# Altium PCB NBIOT.PcbDoc (part 1 of 3)
Units mm, origin at the board's own origin, x right, y up, seen from the top; angles counter-clockwise.
Board outline 152.4 x 101.6 mm, 2 copper layers (Top Layer, Bottom Layer); 66 components, 55 nets, 202 pads, 65 vias.
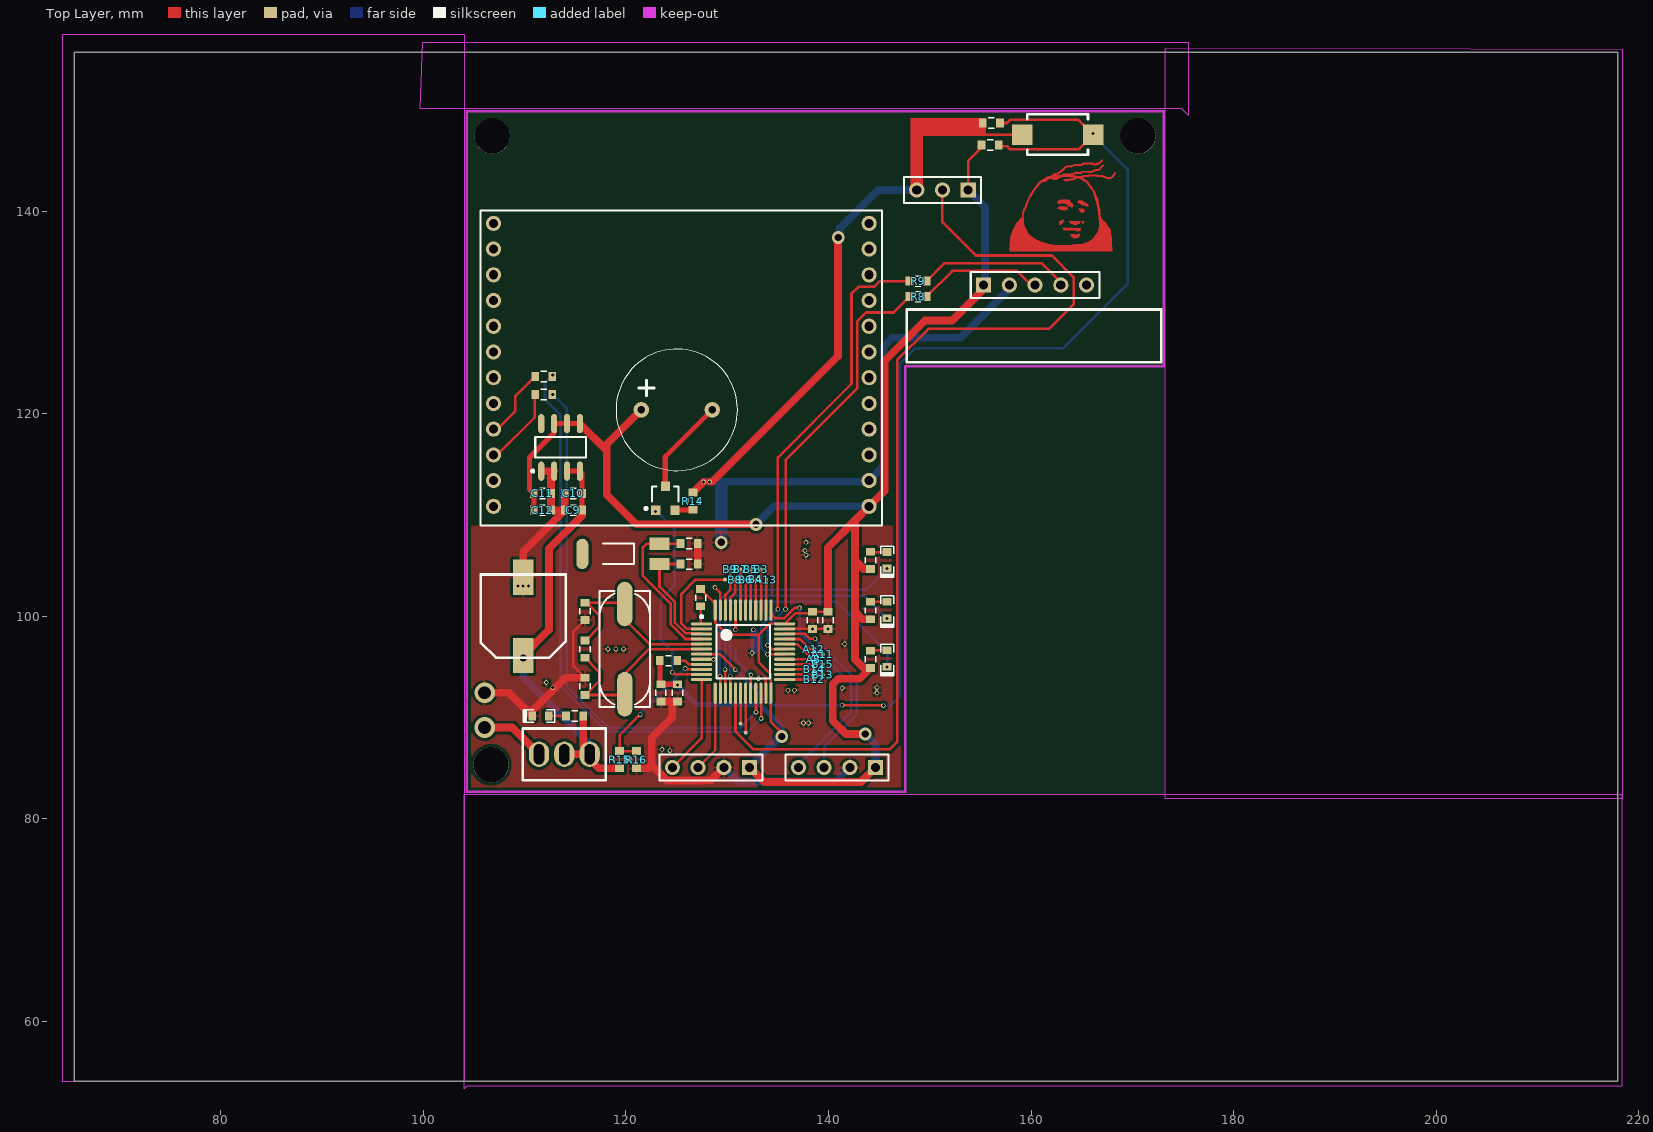
[diagram p0: Top Layer view]
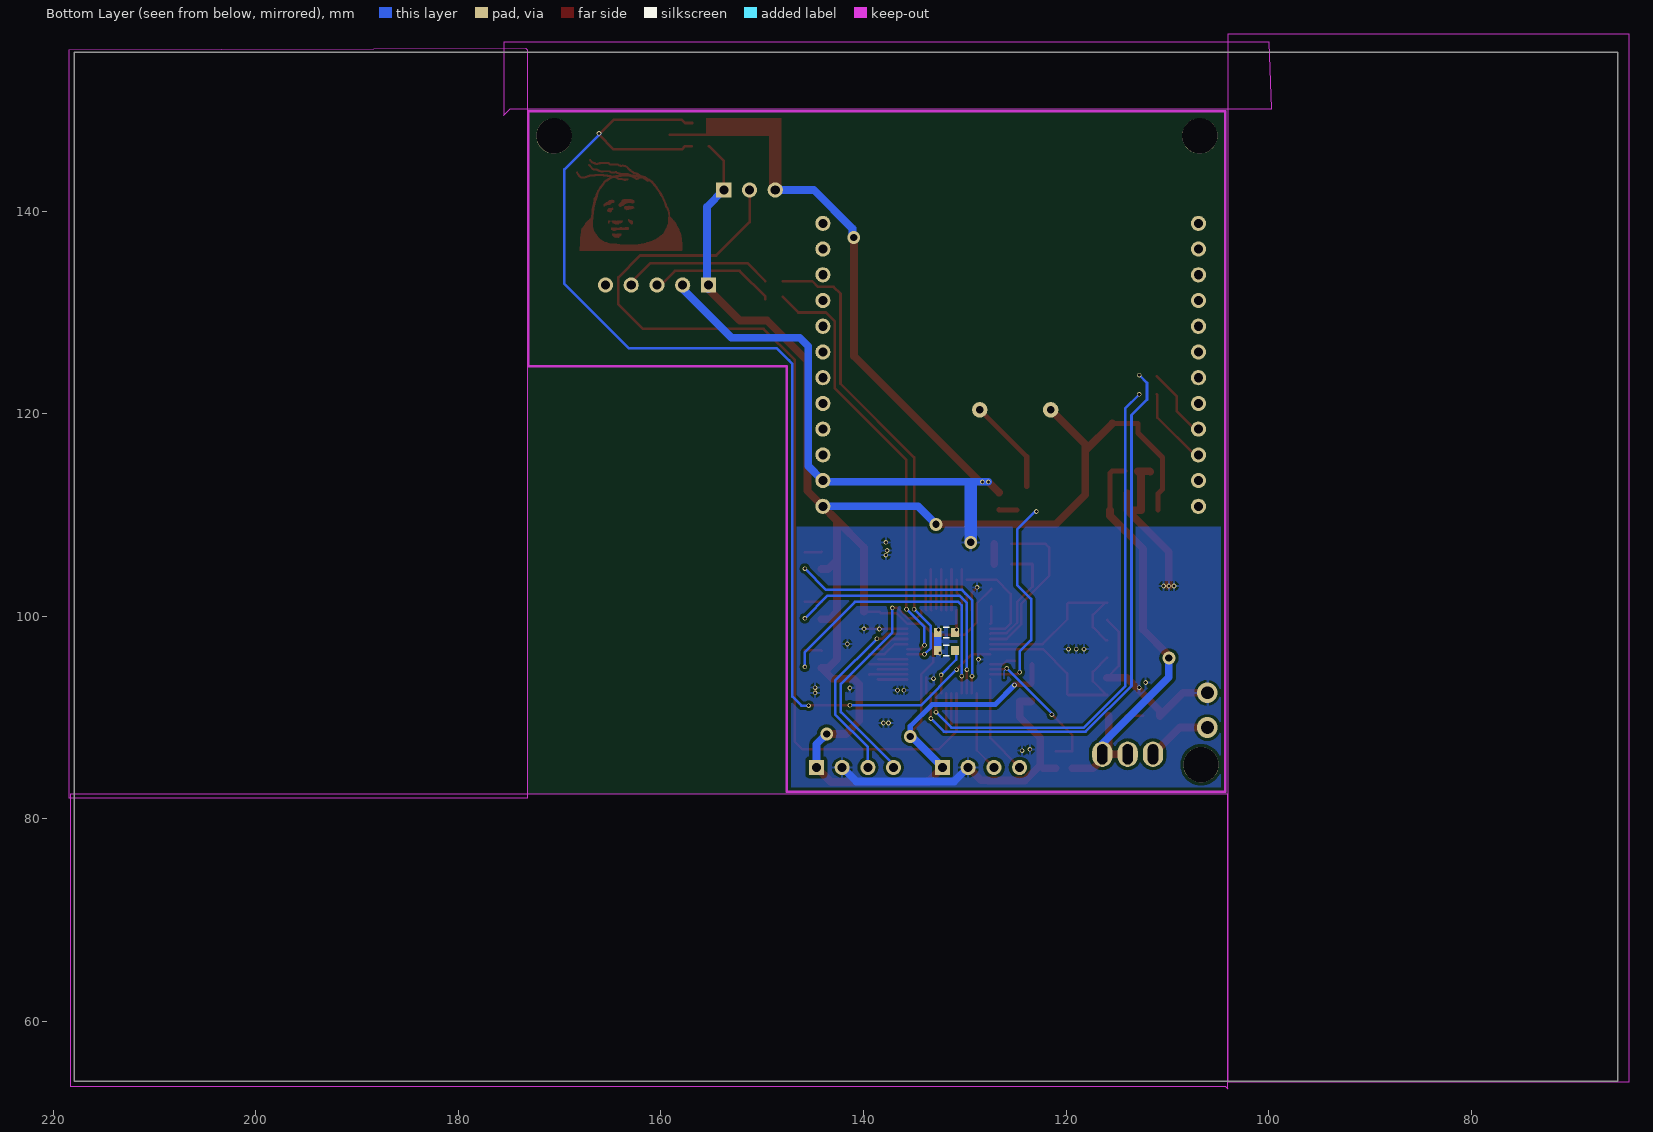
[diagram p1: Bottom Layer view, seen from below]

## Layer stack, top to bottom
Top Solder: solder mask 0.0102, Solder Resist, Dk 3.5
Top Layer: signal copper 0.0356
Dielectric1: dielectric 0.32, FR-4, Dk 4.8
Bottom Layer: signal copper 0.0356
Bottom Solder: solder mask 0.0102, Solder Resist, Dk 3.5

## Board outline
65.532,54.102 65.532,155.702 217.932,155.702 217.932,54.102
cut-out: 99.949,156.718 175.514,156.718 175.514,149.479 174.879,150.114 99.709,150.114
cut-out: 173.355,156.083 173.228,155.956 173.228,82.042 218.44,82.042 218.44,155.956
cut-out: 104.013,82.423 218.313,82.423 218.313,53.594 104.267,53.594 104.013,53.34
cut-out: 64.389,157.48 104.013,157.48 104.013,54.038 64.389,54.038

## Design rules (kind name [scope] priority, off if disabled: settings)
AssemblyTestPointUsage AssemblyTestPointUsage_1 [All] p2:
AssemblyTestpoint AssemblyTestpoint_1 [All] p2: testpointundercomponent=TRUE minsize=1.016 maxsize=2.54 preferedsize=1.524 minholesize=0 maxholesize=1.016 preferedholesize=0.813 testpointgrid=0.025 usegrid=TRUE gridtolerance=0 allowsidetop=TRUE allowsidebottom=TRUE
Clearance [All] p1: gap=0.305 ignorepadtopadclearanceinfootprint=FALSE
ComponentClearance ComponentClearance_1 [All] p2: gap=0.254 collisioncheckmode=3 verticalgap=0.254 showdistances=FALSE
DiffPairsRouting DiffPairsRouting_1 [All] p2: maxlimit=0.254 minlimit=0.254 mostfreqgap=0.254 toplayer_minwidth=0.381 toplayer_maxwidth=0.381 toplayer_prefwidth=0.381 bottomlayer_minwidth=0.381 bottomlayer_maxwidth=0.381 bottomlayer_prefwidth=0.381 maxuncoupledlength=12.7
FabricationTestPointUsage TestPointUsage [All] p2: valid=0 allowmultiple=FALSE
FabricationTestpoint Testpoint [All] p2: side=3 testpointundercomponent=TRUE minsize=1.016 maxsize=2.54 preferedsize=1.524 minholesize=0 maxholesize=1.016 preferedholesize=0.813 testpointgrid=0.025 allowsidetop=TRUE allowsidebottom=TRUE usegrid=TRUE gridtolerance=0
FanoutControl Fanout_LCC [IsLCC] p1: bgadir=Out bgaviamode=Centered fanoutstyle=Auto fanoutdirection=Alternating viagrid=0.025 // Fanout_LCC (Default Rule)
FanoutControl Fanout_BGA [IsBGA] p2: bgadir=Out bgaviamode=Centered fanoutstyle=Auto fanoutdirection=Alternating viagrid=0.025 // Fanout_BGA (Default Rule)
FanoutControl Fanout_Default [All] p4: bgadir=Out bgaviamode=Centered fanoutstyle=Auto fanoutdirection=Alternating viagrid=0.025 // Fanout_Default (Default Rule)
FanoutControl Fanout_Small [(CompPinCount < 5)] p5: bgadir=Out bgaviamode=Centered fanoutstyle=Auto fanoutdirection=OutThenIn viagrid=0.025 // Fanout_Small (Default Rule)
FanoutControl Fanout_BGA_1 [IsBGA] p6: bgadir=Out bgaviamode=Centered fanoutstyle=Auto fanoutdirection=Alternating viagrid=0.025 // Fanout_BGA (Default Rule)
FanoutControl Fanout_LCC_1 [IsLCC] p7: bgadir=Out bgaviamode=Centered fanoutstyle=Auto fanoutdirection=Alternating viagrid=0.025 // Fanout_LCC (Default Rule)
FanoutControl Fanout_SOIC_1 [IsSOIC] p8: bgadir=Out bgaviamode=Centered fanoutstyle=Auto fanoutdirection=Alternating viagrid=0.025 // Fanout_SOIC (Default Rule)
FanoutControl Fanout_Small_1 [(CompPinCount < 5)] p9: bgadir=Out bgaviamode=Centered fanoutstyle=Auto fanoutdirection=OutThenIn viagrid=0.025 // Fanout_Small (Default Rule)
FanoutControl Fanout_Default_1 [All] p10: bgadir=Out bgaviamode=Centered fanoutstyle=Auto fanoutdirection=Alternating viagrid=0.025 // Fanout_Default (Default Rule)
Height Height_1 [All] p2: minheight=0 maxheight=25.4 prefheight=12.7
HoleSize HoleSize_1 [All] p2: absolutevalues=TRUE maxlimit=2.54 minlimit=0.025 maxpercent=80.000 minpercent=20.000
HoleToHoleClearance HoleToHoleClearance_1 [All] p2: gap=0.254 allowstackedmicrovias=TRUE
LayerPairs LayerPairs_1 [All] p2: enforce=TRUE
MinimumSolderMaskSliver MinimumSolderMaskSliver_1 [All] p2: minsoldermaskwidth=0.254
NetAntennae NetAntennae_1 [All] p2: netantennaetolerance=0
PasteMaskExpansion PasteMaskExpansion_1 [All] p2: expansion=0
PlaneClearance PlaneClearance_1 [All] p2: clearance=0.508
PolygonConnect [All] p1: connectstyle=Relief reliefconductorwidth=0.254 reliefentries=4 polygonreliefangle="90 Angle" airgapwidth=0.254
PolygonConnect PolygonConnect_1 [All] p2: connectstyle=Relief reliefconductorwidth=0.254 reliefentries=4 polygonreliefangle="90 Angle" airgapwidth=0.254
RoutingPriority RoutingPriority_1 [All] p2: routingpriority=0
RoutingTopology RoutingTopology_1 [All] p2: topology=Shortest
RoutingVias [All] p1: holewidth=0.6 width=1 viastyle="Through Hole" minholewidth=0.711 minwidth=1.27 maxholewidth=0.711 maxwidth=1.27
ShortCircuit ShortCircuit_1 [All] p2: allowed=FALSE
SilkToBoardRegionClearance SilkToBoardRegionClearance_1 [All] p2:
SilkToSilkClearance SilkToSilkClearance_1 [All] p2: silktosilkclearance=0.254
SilkToSolderMaskClearance SilkscreenOverComponentPads [IsPad] p2: minsilkscreentomaskgap=0.254 clearancetoexposedcopper=TRUE
SolderMaskExpansion [All] p1: expansion=0.102
SolderMaskExpansion SolderMaskExpansion_1 [All] p2: expansion=0.102
UnRoutedNet UnRoutedNet_1 [All] p2:
UnpouredPolygon UnpouredPolygon_1 [All] p2:
Width [All] p1: maxlimit=2.54 minlimit=0.203 preferedwidth=0.254
26 further rules are at their usual default settings.

## Components (designator, comment, footprint, x,y, rotation, side; value= is the part's Value field where it differs from the comment)
* "" "SMALL SW - duplicate" 113.919,86.36 r270 top
A8 "" pin 139.065,96.774 r0 top
A11 "" pin 138.43,96.774 r90 top
A12 "" pin 137.541,97.282 r90 top
A13 "" pin 132.842,104.14 r90 top
B0 "" pin 131.826,90.424 r0 top
B1 "" pin 132.334,89.535 r0 top
B3 "" pin 133.858,105.664 r0 top
B4 "" pin 133.322,104.671 r0 top
B5 "" pin 132.842,105.664 r0 top
B6 "" pin 132.334,104.648 r0 top
B7 "" pin 131.826,105.664 r0 top
B8 "" pin 131.318,104.648 r0 top
B9 "" pin 130.81,105.664 r0 top
B12 "" pin 137.566,94.285 r90 top
B13 "" pin 138.43,94.742 r90 top
B14 "" pin 137.566,95.275 r90 top
B15 "" pin 138.41,95.778 r90 top
BZ? "" BUZZ 125.024,120.396 r0 top
C1 "" 0603(1608) 138.436,99.612 r270 top
C2 "" 0603(1608) 139.96,99.612 r270 top
C3 "" 0603(1608) 123.444,92.456 r270 top
C4 "" 0603(1608) 125.095,92.456 r270 top
C5 "" 0603(1608) 115.951,100.495 r90 top value=100nF
C6 "" 0603(1608) 115.951,93.091 r90 top value=100nF
C7 "" 0603(1608) 126.238,105.156 r180 top value=100nF
C8 "" 0603(1608) 126.238,107.188 r180 top value=100nF
C9 "" 0603(1608) 114.808,110.49 r0 top value=100nF
C10 "" 0603(1608) 114.808,112.141 r180 top value=100nF
C11 "" 0603(1608) 111.76,112.141 r0 top value=100nF
C12 "" 0603(1608) 111.76,110.49 r0 top value=100nF
C13 "" 铝电解电容10*10.2 109.855,95.885 r90 top
C14 "" 0603(1608) 155.956,146.558 r0 top value=100nF
D1 "" 0603LED 145.796,95.834 r270 top
D2 "" 0603LED 145.796,100.622 r270 top
D3 "" 0603LED 145.796,105.537 r270 top
D? "" 0603LED 111.557,90.17 r180 top
DHT11 "" HDR1X3 153.797,142.113 r180 top
GPS "" HDR1X5 155.321,132.715 r0 top
NB "" "NB-IOT bottom" 91.059,128.016 r0 top
PC13 "" pin 128.778,104.14 r90 top
Q1 "" SOT-23 123.891,111.665 r0 top
R1 "" 0603(1608) 131.826,98.425 r0 bottom value=10K
R2 "" 0603(1608) 131.826,96.647 r180 bottom value=10K
R3 "" 0603(1608) 115.951,96.774 r90 top
R4 "" 0603(1608) 127.381,101.854 r90 top value=10K
R5 "" 0603(1608) 124.206,95.631 r180 top value=10K
R6 "" 0603(1608) 111.887,123.698 r180 top value=10K
R7 "" 0603(1608) 111.887,121.92 r180 top value=10K
R8 "" 0603(1608) 148.844,131.572 r0 top value=10K
R9 "" 0603(1608) 148.844,133.096 r0 top value=10K
R10 "" 0603(1608) 114.935,90.17 r0 top
R11 "" 0603(1608) 144.145,105.537 r270 top
R12 "" 0603(1608) 144.145,100.584 r270 top
R13 "" 0603(1608) 144.145,95.758 r270 top
R14 "" 0603(1608) 126.619,111.379 r270 top
R15 "" 0603(1608) 119.38,85.852 r270 top
R16 "" 0603(1608) 121.031,85.852 r90 top
R? "" 0603(1608) 156.083,148.717 r180 top
RST? "" SMT_BUTTON 162.631,147.574 r0 top
SWD "" HDR1X4 144.653,85.09 r180 top
U1 "" SOIC-8 113.538,116.713 r90 top
U? "" LQFP-48_M 131.572,96.52 r0 top
UART "" HDR1X4 132.207,85.09 r180 top
X1 "" X-SM49 119.888,96.774 r90 top value=8M
X2 "" X-TC15 123.317,106.172 r270 top value=8M

## Footprints (in the part's own frame and the unit in brackets; to place one, negate y for a bottom-side part, rotate by r counter-clockwise, add the part's x,y. Pads: shape width x height; smd on the part's side, far side on the other; paste and mask are expansions set on the pad)
0603(1608) [mil]
  rect 30x35 smd: 1(-33.5,0) 2(33.5,0)
  silkscreen extent -12,-20 12,20
0603LED [mil]
  rect 30x35 smd: 1(-32,0) 2(32,0)
  silkscreen extent -55,-25 66,25
BUZZ [mil]
  round 60 hole 30: 1(-137.8,0) 2(137.8,0)
  silkscreen extent -236,-236 236,236
HDR1X3 [mm] "Connector; Header; 3 Position"
  rect 1.5x1.5 hole 0.9: 1(0,0)
  round 1.5 hole 0.9: 2(2.54,0) 3(5.08,0)
  silkscreen extent -1.27,-1.27 6.35,1.27
HDR1X4 [mm] "Connector; Header; 4 Position"
  rect 1.5x1.5 hole 0.9: 1(0,0)
  round 1.5 hole 0.9: 2(2.54,0) 3(5.08,0) 4(7.62,0)
  silkscreen extent -1.27,-1.27 8.89,1.27
HDR1X5 [mm] "Connector; Header; 5 Position"
  rect 1.5x1.5 hole 0.9: 1(0,0)
  round 1.5 hole 0.9: 2(2.54,0) 3(5.08,0) 4(7.62,0) 5(10.16,0)
  silkscreen extent -1.27,-1.27 11.43,1.27
LQFP-48_M [mm] "Thin QFP, 48-Leads, Body 7x7mm, Pitch 0.5mm, IPC Low Density"
  oval 2.1x0.3 smd: 1(-4.1,2.75) 2(-4.1,2.25) 3(-4.1,1.75) 4(-4.1,1.25) 5(-4.1,0.75) 6(-4.1,0.25) 7(-4.1,-0.25) 8(-4.1,-0.75) 9(-4.1,-1.25) 10(-4.1,-1.75) 11(-4.1,-2.25) 12(-4.1,-2.75) 25(4.1,-2.75) 26(4.1,-2.25) 27(4.1,-1.75) 28(4.1,-1.25) 29(4.1,-0.75) 30(4.1,-0.25) 31(4.1,0.25) 32(4.1,0.75) 33(4.1,1.25) 34(4.1,1.75) 35(4.1,2.25) 36(4.1,2.75)
  oval 0.3x2.1 smd: 13(-2.75,-4.1) 14(-2.25,-4.1) 15(-1.75,-4.1) 16(-1.25,-4.1) 17(-0.75,-4.1) 18(-0.25,-4.1) 19(0.25,-4.1) 20(0.75,-4.1) 21(1.25,-4.1) 22(1.75,-4.1) 23(2.25,-4.1) 24(2.75,-4.1) 37(2.75,4.1) 38(2.25,4.1) 39(1.75,4.1) 40(1.25,4.1) 41(0.75,4.1) 42(0.25,4.1) 43(-0.25,4.1) 44(-0.75,4.1) 45(-1.25,4.1) 46(-1.75,4.1) 47(-2.25,4.1) 48(-2.75,4.1)
  silkscreen extent -4.22,-2.65 2.65,3.57, body extent -3.5,-3.5 3.5,3.5, height 1.6
"NB-IOT bottom" [mm] "Connector; Header; 16 Position"
  round 1.5 hole 0.9: 1(15.875,10.795) 2(15.875,8.255) 3(15.875,5.715) 4(15.875,3.175) 5(15.875,0.635) 6(15.875,-1.905) 7(15.875,-4.445) 8(15.875,-6.985) 9(15.875,-9.525) 10(15.875,-12.065) 11(15.875,-14.605) 12(15.875,-17.145) 13(52.959,-17.145) 14(52.959,-14.605) 15(52.959,-12.065) 16(52.959,-9.525) 17(52.959,-6.985) 18(52.959,-4.445) 19(52.959,-1.905) 20(52.959,0.635) 21(52.959,3.175) 22(52.959,5.715) 23(52.959,8.255) 24(52.959,10.795)
  silkscreen extent 14.6,-19.05 54.23,12.06
pin [mil]
  round 15 smd: 1(-20,-40)
"SMALL SW - duplicate" [mm]
  oval 2.5x2 hole 1 slot 2 at 0 deg: 1(-0.025,2.5) 1(-0.025,0) 2(-0.025,-2.5)
  silkscreen extent -2.58,-4.1 2.52,4.1, body extent -2.85,-4.09 2.76,3.83, height 15.84
SMT_BUTTON [mil]
  rect 80x80 smd: 1(-137.8,0) 2(137.8,0)
  silkscreen extent -118,-79 118,79
SOIC-8 [mm]
  oval 1.9x0.6 smd: 1(-2.37,1.895) 2(-2.37,0.625) 3(-2.37,-0.645) 4(-2.37,-1.915) 5(2.33,-1.915) 6(2.33,-0.645) 7(2.33,0.625) 8(2.33,1.895)
  silkscreen extent -2.49,-2.51 0.98,2.87, body extent -2.02,-2.51 1.98,2.49, height 1.75
SOT-23 [mm]
  rect 0.9x0.95 smd: 1(-0.95,-1.175) 2(0.95,-1.175) 3(0,1.175)
  silkscreen extent -2.03,-1.14 1.3,1.18
X-SM49 [mm]
  oval 4.4x1.5 smd: 1(4.45,0.004) 2(-4.45,-0.004)
  silkscreen extent -5.7,-2.5 5.72,2.5
X-TC15 [mm] "圆柱晶振1"
  rect 1.2x2 smd: 1(-1,0) 2(1,0)
  oval 3x1.2 smd: 3(0,-7.62)
  silkscreen extent -1.02,-5.59 1.02,-2.54, body extent -1,-8.29 1,0, height 1.99
铝电解电容10*10.2 [mm]
  rect 3.5x2 smd: 1(0.254,0) 2(8.001,0)
  silkscreen extent 0.04,-4.19 8.25,4.19

## Part data
*: library part "small sw"
A8 A11 A12 A13 B0 B1 B3 B4 B5 B6 B7 B8 B9 B12 B13 B14 B15 PC13: library part pin
BZ?: library part BUZZ
C1 C2 C3 C4: library part 普通电容, "Capacitor"
C5 C6 C7 C8 C9 C10 C11 C12: library part Cap_1, "Capacitor", LatestRevisionDate=17-Jul-2002, LatestRevisionNote="Re-released for DXP Platform.", PackageDescription="Radial Cap, Thru-Hole; 2 Leads; 0.3 in Pin Spacing", PackageReference=RAD-0.3, Published=8-Jun-2000, Publisher="Altium Limited"
C13: library part CAP2, "电容带极性", =220uF
C14: library part Cap, "无极性电容", LatestRevisionDate=17-Jul-2002, LatestRevisionNote="Re-released for DXP Platform.", PackageReference=RAD-0.3, Published=8-Jun-2000, Publisher="Altium Limited"
D1 D2 D3 D?: library part LED_1, "LED"
DHT11: library part "Header 3", "Header, 3-Pin", LatestRevisionDate=17-Jul-2002, LatestRevisionNote="Re-released for DXP Platform.", Publisher="Altium Limited"
GPS: library part "Header 5", "GPS", LatestRevisionDate=17-Jul-2002, LatestRevisionNote="Re-released for DXP Platform.", Publisher="Altium Limited"
NB: library part "NB-IOT bottom"
Q1: library part SS8050, "NPN贴片三极管", PackageDocument=Sep-1998, Code_JEDEC=TO-92A, ComponentLink1Description="Manufacturer Link", ComponentLink1URL=http://www.fairchildsemi.com/, ComponentLink2Description=Datasheet, ComponentLink2URL=http://www.fairchildsemi.com/ds/2N%2F2N3904.pdf, DatasheetDocument=1997, LatestRevisionDate=15-Jan-2003, LatestRevisionNote="PCB Footprint 'BCY-W3/D4.7' replaced", PackageReference=TO-92A, Published=8-Jun-2000, Publisher="Altium Limited"
R1 R2 R4 R5 R6 R7 R8 R9: library part Res2_1, "Resistor", LatestRevisionDate=17-Jul-2002, LatestRevisionNote="Re-released for DXP Platform.", PackageDescription="Axial Device, Thru-Hole; 2 Leads; 0.4 in Pin Spacing", PackageReference=AXIAL-0.4, Published=8-Jun-2000, Publisher="Altium Limited"
R3 R10 R11 R12 R13 R14 R15 R16 R?: library part RES
RST?: library part 微动开关
SWD UART: library part "Header 4", "Header, 4-Pin", LatestRevisionDate=17-Jul-2002, LatestRevisionNote="Re-released for DXP Platform.", Publisher="Altium Limited"
U1: library part TPS
U?: library part STM32F103C, "STM32单片机48引脚"
X1: library part XTAL, "晶振", LatestRevisionDate=17-Jul-2002, LatestRevisionNote="Re-released for DXP Platform.", PackageReference=R38, Published=8-Jun-2000, Publisher="Altium Limited"
X2: library part XTAL_SM, "圆柱晶振", LatestRevisionDate=17-Jul-2002, LatestRevisionNote="Re-released for DXP Platform.", PackageReference=R38, Published=8-Jun-2000, Publisher="Altium Limited"

## Free pads (board coordinates)
  round 3.5 hole 3.5: 3(106.68,85.344) 3(106.807,147.447) 3(170.561,147.447)

## Via types
v1: diameter 0.457, hole 0.305, Top Layer to Bottom Layer, 57 vias
v2: diameter 1.27, hole 0.711, Top Layer to Bottom Layer, 6 vias
v3: diameter 2.032, hole 1.27, Top Layer to Bottom Layer, 2 vias

## Nets (pads, with @x,y where several pads share a name; then routed paths per layer and width w, separated by ;. In a path a pad name is that pad's centre, name@x,y a point inside that pad or via, vN(x,y) a via of type N, cw(c..) or ccw(c..) an arc to the next point about the centre after c; other vN are vias at no path point)
3.3v: BZ?.1 C1.1 C2.1 C3.1 C4.1 C11.1 C12.1 C14.1 DHT11.1 GPS.1 NB.13 R4.2 R5.2 R11.2 R12.2 R13.2 SWD.1 U1.5 U1.6 U1.7 U?.24 U?.36 U?.48 UART.1 | length 205.9
  Top Layer w0.254: R4.2@127.381,102.705 128.822,101.264 U?.48@128.822,100.62 128.822,99.397 130.048,98.171 133.096,98.171 ; v2@135.763,88.138 134.322,89.579 U?.24@134.322,92.42 134.322,94.278 133.096,95.504 133.096,98.171 ; C2.1@139.96,100.463 C1.1@138.436,100.463 138.303,100.33 136.732,100.33 U?.36@135.672,99.27 134.195,99.27 133.096,98.171 ; DHT11.1@153.797,142.113 153.797,144.958 C14.1@155.27,146.431
  Top Layer w0.508: C12.1@110.909,110.49 C11.1@110.909,112.141 110.49,112.56 110.49,115.697 112.913,118.12 U1.7@112.913,119.043 U1.6@114.183,119.043 U1.5@115.453,119.043 ; R5.2@123.355,95.25 123.355,93.396 C3.1@123.444,93.307 C4.1@125.095,93.307
  Top Layer w0.762: U1.5@115.453,119.043 118.11,116.386 ; BZ?.1@121.524,120.396 118.11,116.982 118.11,116.386 ; UART.1@132.207,85.09 133.643,83.654 143.217,83.654 SWD.1@144.653,85.09 ; v2(132.842,109.093) 121.031,109.093 118.11,112.014 118.11,116.386 ; C2.1@139.96,100.463 139.96,106.813 142.621,109.474 ; v2(143.637,88.392) 141.732,88.392 140.437,89.687 140.437,93.305 140.972,93.84 143.078,93.84 R13.2@144.145,94.907 143.472,94.907 142.621,95.758 142.621,100.457 ; R12.2@144.145,99.733 143.345,99.733 142.621,100.457 ; R11.2@144.145,104.686 143.472,104.686 142.621,105.537 ; GPS.1@155.321,132.334 152.197,129.21 149.523,129.21 145.542,125.228 145.542,112.395 NB.13@144.018,110.871 142.621,109.474 ; 142.621,100.457 142.621,105.537 ; 142.621,105.537 142.621,109.474
  Bottom Layer w0.508: v1(125.095,93.218) 127,91.313 133.223,91.313 135.382,89.154 v2(135.382,88.138)
  Bottom Layer w0.762: UART.1@132.207,85.09 v2@135.255,88.138 ; v2(132.842,109.093) 134.62,110.871 NB.13@144.018,110.871 ; v2(143.637,88.392) 144.653,87.376 SWD.1@144.653,85.09 ; DHT11.1@153.797,142.113 155.448,140.462 155.448,132.461 GPS.1@155.321,132.334
A0: R15.1 R16.2 U?.10 | length 15.5
  Top Layer w0.254: R16.2@121.031,86.703 R15.1@119.38,86.703 119.38,88.265 v1(121.412,90.297) ; v1(125.857,94.869) 125.956,94.77 U?.10@127.472,94.77
  Bottom Layer w0: v1(125.857,94.869) 126.111,94.615 126.111,93.853
  Bottom Layer w0.254: v1(121.412,90.297) 121.285,90.297 v1(125.857,94.869)
A1: Q1.1 U?.11 | length 20.8
  Top Layer w0.254: v1(124.587,94.488) 124.805,94.27 U?.11@127.472,94.27
  Bottom Layer w0.254: v1(122.936,110.363) 123.063,110.363 124.841,108.585 124.841,103.124 123.444,101.727 123.444,97.663 124.587,96.52 v1(124.587,94.488)
A4: D3.2 U?.14 | length 27.5
  Top Layer w0.254: v1(129.286,94.107) 129.322,94.071 U?.14@129.322,92.42
  Bottom Layer w0.254: v1(129.286,94.107) 129.286,101.6 129.934,102.248 ; 129.596,101.938 130.274,102.616 143.688,102.616 v1(145.796,104.724)
A5: D2.2 U?.15 | length 26.2
  Top Layer w0.254: v1(129.794,94.742) 129.794,92.448 U?.15@129.822,92.42
  Bottom Layer w0.254: v1(129.794,94.742) 129.794,101.346 130.505,102.057 130.81,102.057 143.548,102.057 v1(145.796,99.809)
A6: D1.2 U?.16 | length 27.8
  Top Layer w0.254: v1(130.302,94.107) 130.302,92.44 U?.16@130.322,92.42
  Bottom Layer w0.254: v1(130.302,94.107) 130.302,101.092 130.645,101.435 140.843,101.435 145.796,96.482 v1(145.796,95.021)
A7: DHT11.2 U?.17 | length 99.3
  Top Layer w0.254: U?.17@130.822,92.42 130.822,88.634 132.588,86.868 146.05,86.868 146.812,87.63 146.812,125.349 149.86,128.397 161.798,128.397 164.211,130.81 164.211,133.477 162.052,135.636 154.559,135.636 151.257,138.938 DHT11.2@151.257,142.113
BAT: *.1 C9.2 C10.1 C13.1 R10.2 R15.2 U1.3 U1.4 | length 44.1
  Top Layer w0.508: U1.3@114.183,114.343 U1.4@115.453,114.343 115.659,114.137 C10.1@115.659,112.141 C9.2@115.659,110.49
  Top Layer w0.762: C13.1@109.855,96.139 112.395,98.679 112.395,106.68 115.659,109.944 C9.2@115.659,110.49 ; *.1@113.919,86.385 *.1@115.951,86.385 ; R10.2@115.786,90.17 115.786,86.55 *.1@115.951,86.385 ; R15.2@119.38,85.001 117.335,85.001 *.1@115.951,86.385
  Bottom Layer w0.762: v2(109.855,95.885) 109.855,93.98 116.419,87.416 *.1@116.419,86.385
GND: C1.2 C2.2 C3.2 C4.2 C5.1 C6.2 C7.1 C8.1 C9.1 C10.2 C11.2 C12.2 C13.2 D?.2 DHT11.3 GPS.2 NB.14 R1.2 R2.1 R14.1 R16.1 R?.2 RST?.1 SWD.2 U1.1 U1.2 U?.8 U?.23 U?.35 U?.47 UART.2 | length 173.7
  Top Layer w0.254: C6.2@115.951,93.942 114.808,95.085 114.808,98.501 C5.1@115.951,99.644 ; v1(128.778,102.87) 129.322,102.326 U?.47@129.322,100.62 ; U?.23@133.822,92.42 133.822,93.982 ; U?.35@135.672,98.77 v1(139.951,98.77) C2.2@139.96,98.761 ; v1@144.742,92.926 v1(144.78,92.964) v1(144.78,92.456) ; 154.178,147.574 155.194,147.574 ; R?.2@155.232,148.717 155.232,147.612 155.194,147.574 ; RST?.1@159.131,147.574 155.194,147.574
  Top Layer w0.762: v3(106.045,92.456) 108.458,92.456 D?.2@110.744,90.17 110.744,90.678 114.008,93.942 C6.2@115.951,93.942 ; v1(109.855,102.997) C13.2@109.855,103.886 109.855,106.388 C9.1@113.957,110.49 ; U1.1@111.697,114.289 111.75,114.343 U1.2@112.913,114.343 112.611,114.041 C11.2@112.611,112.141 C12.2@112.611,110.49 C9.1@113.957,110.49 ; C10.2@113.957,112.141 C9.1@113.957,110.49 ; R16.1@121.031,85.001 122.249,85.001 122.555,85.307 ; C3.2@123.444,91.605 124.587,91.605 124.587,90.043 122.555,88.011 122.555,85.307 ; R14.1@126.619,112.23 v1(127.673,113.284) ; C7.1@127.089,105.156 C8.1@127.089,107.188 ; v1(128.27,113.284) 128.524,113.284 140.933,125.693 v2@140.933,137.541 ; UART.2@129.667,85.09 128.397,83.82 127.672,83.82 127.659,83.807 124.055,83.807 122.555,85.307
  Bottom Layer w0.762: v1(127.673,113.284) v1(128.27,113.284) 143.891,113.284 NB.14@144.018,113.411 145.454,114.847 145.454,126.658 146.304,127.508 153.035,127.508 GPS.2@157.861,132.334 ; UART.2@129.667,85.09 131.05,83.707 140.73,83.707 SWD.2@142.113,85.09 ; R2.1@132.677,96.647 R1.2@132.677,98.425 ; v2@141.097,137.541 141.097,138.303 144.907,142.113 DHT11.3@148.717,142.113 DHT11.3@148.526,141.922
  other v1: 124.333,86.741 123.571,86.868 137.541,89.479 138.049,89.479 136.017,92.71 136.652,92.71 141.351,92.926 112.776,92.964 112.141,93.472 133.096,93.853 128.651,95.758 132.461,96.393 118.237,96.774 118.999,96.774 119.761,96.774 141.605,97.282 132.588,98.679 138.436,98.761 109.347,102.997 110.363,102.997 137.795,106.045 137.668,106.512 137.795,107.315
  other v2: 129.413,107.315 140.97,137.414
Net*_2: *.2 | length 6.5
  Top Layer w0.762: v3(106.045,89.027) 108.777,89.027 *.2@111.419,86.385
NetA8_1: A8.1 U?.29 | length 2.9
  Top Layer w0.254: U?.29@135.672,95.77 138.545,95.77 A8.1@138.557,95.758
NetA11_1: A11.1 U?.32 | length 4.2
  Top Layer w0.254: U?.32@135.672,97.27 136.918,97.27 137.922,96.266 A11.1@139.446,96.266
NetA12_1: A12.1 U?.33 | length 3.3
  Top Layer w0.254: U?.33@135.672,97.77 137.18,97.77 138.176,96.774 A12.1@138.557,96.774
NetA13_1: A13.1 U?.38 | length 3
  Top Layer w0.254: U?.38@133.822,100.62 133.858,100.656 A13.1@133.858,103.632
NetB0_1: B0.1 U?.18 | length 3
  Top Layer w0.254: B0.1@131.318,89.408 131.322,89.412 U?.18@131.322,92.42
NetB1_1: B1.1 U?.19 | length 3.9
  Top Layer w0.254: U?.19@131.822,92.42 131.826,92.416 B1.1@131.826,88.519
NetB3_1: B3.1 U?.39 | length 4
  Top Layer w0.254: U?.39@133.322,100.62 133.35,100.648 B3.1@133.35,104.648
NetB4_1: B4.1 U?.40 | length 2.9
  Top Layer w0.254: U?.40@132.814,100.747 B4.1@132.814,103.655
NetB5_1: B5.1 U?.41 | length 4
  Top Layer w0.254: U?.41@132.322,100.62 132.334,100.632 B5.1@132.334,104.648
NetB6_1: B6.1 U?.42 | length 3
  Top Layer w0.254: U?.42@131.822,100.62 131.826,100.624 B6.1@131.826,103.632
NetB7_1: B7.1 U?.43 | length 4
  Top Layer w0.254: B7.1@131.318,104.648 131.318,100.624 U?.43@131.322,100.62
NetB8_1: B8.1 U?.45 | length 3.2
  Top Layer w0.254: U?.45@130.322,100.62 130.322,101.874 130.81,102.362 B8.1@130.81,103.632
NetB9_1: B9.1 U?.46 | length 4.2
  Top Layer w0.254: U?.46@129.822,100.62 129.822,102.136 130.302,102.616 B9.1@130.302,104.648
NetB12_1: B12.1 U?.25 | length 2.9
  Top Layer w0.254: U?.25@135.672,93.77 138.576,93.77 B12.1@138.582,93.777
NetB13_1: B13.1 U?.26 | length 3.8
  Top Layer w0.254: U?.26@135.672,94.27 139.41,94.27 B13.1@139.446,94.234
NetB14_1: B14.1 U?.27 | length 2.9
  Top Layer w0.254: U?.27@135.672,94.77 138.58,94.77 B14.1@138.582,94.767
NetB15_1: B15.1 U?.28 | length 3.8
  Top Layer w0.254: U?.28@135.672,95.27 B15.1@139.426,95.27
NetBZ?_2: BZ?.2 Q1.3 | length 9.5
  Top Layer w0.508: Q1.3@123.891,112.84 123.891,115.763 BZ?.2@128.524,120.396
NetC5_2: C5.2 R3.2 U?.5 X1.1 | length 19
  Top Layer w0.254: R3.2@115.951,97.625 116.04,97.625 117.348,98.933 117.348,100.139 C5.2@116.141,101.346 ; C5.2@115.951,101.346 C5.2@116.141,101.346 ; U?.5@127.472,97.27 122.313,97.27 119.884,99.699 X1.1@119.884,101.224 119.762,101.346 C5.2@116.141,101.346
NetC6_1: C6.1 R3.1 U?.6 X1.2 | length 19.4
  Top Layer w0.254: C6.1@115.951,92.24 C6.1@115.989,92.24 ; R3.1@115.951,95.923 117.348,94.526 117.348,93.599 C6.1@115.989,92.24 ; U?.6@127.472,96.77 122.297,96.77 119.892,94.365 X1.2@119.892,92.324 119.808,92.24 C6.1@115.989,92.24
NetC7_2: C7.2 U?.3 X2.2 | length 11.6
  Top Layer w0.254: C7.2@125.387,105.156 125.371,105.172 X2.2@123.317,105.172 123.317,102.937 124.841,101.413 124.841,99.374 125.875,98.341 127.401,98.341 U?.3@127.472,98.27
NetC8_2: C8.2 U?.4 X2.1 | length 16.3
  Top Layer w0.254: C8.2@125.387,107.188 125.371,107.172 X2.1@123.317,107.172 122.031,107.172 121.666,106.807 121.666,104.013 124.435,101.244 124.435,99.206 125.871,97.77 U?.4@127.472,97.77
NetD1_1: D1.1 R13.1 | length 1.7
  Top Layer w0.254: R13.1@144.145,96.609 144.183,96.647 D1.1@145.796,96.647
NetD2_1: D2.1 R12.1 | length 1.7
  Top Layer w0.254: R12.1@144.145,101.435 D2.1@145.796,101.435
NetD3_1: D3.1 R11.1 | length 1.7
  Top Layer w0.254: R11.1@144.145,106.388 144.183,106.35 D3.1@145.796,106.35
NetD?_1: D?.1 R10.1 | length 1.7
  Top Layer w0.254: D?.1@112.37,90.17 R10.1@114.084,90.17
NetGPS_3: GPS.3 R8.2 | length 12.8
  Top Layer w0.254: R8.2@149.695,131.305 R8.2@149.695,131.572 152.235,134.112 158.623,134.112 GPS.3@160.401,132.334
NetGPS_4: GPS.4 R9.2 | length 15.4
  Top Layer w0.254: R9.2@149.695,133.096 151.473,134.874 161.036,134.874 162.941,132.969 GPS.4@162.941,132.334
NetNB_9: NB.9 R6.2 | length 7.4
  Top Layer w0.254: NB.9@107.188,118.872 107.188,118.364 109.093,120.269 109.093,121.755 R6.2@111.036,123.698
NetNB_10: NB.10 R7.2 | length 7.7
  Top Layer w0.254: NB.10@107.188,115.824 110.998,119.634 110.998,121.882 R7.2@111.036,121.92
NetPC13_1: PC13.1 U?.2 | length 10
  Top Layer w0.254: U?.2@127.472,98.77 126.02,98.77 125.476,99.314 125.476,102.235 126.873,103.632 PC13.1@129.794,103.632
NetQ1_2: Q1.2 R14.2 | length 1.8
  Top Layer w0.508: Q1.2@124.841,110.49 126.581,110.49 R14.2@126.619,110.528
NetR1_1: R1.1 U?.44 | length 1.9
  Top Layer w0.254: v1(130.81,98.679) 130.822,98.691 U?.44@130.822,100.62
NetR2_2: R2.2 U?.20 | length 4.8
  Top Layer w0.254: U?.20@132.322,92.42 132.334,92.432 v1(132.334,94.234)
  Bottom Layer w0.254: R2.2@130.848,96.647 130.848,95.72 v1(132.334,94.234)
NetR4_1: R4.1 U?.1 | length 1.8
  Top Layer w0.254: R4.1@127.381,101.003 127.381,99.361 U?.1@127.472,99.27
NetR5_1: R5.1 U?.9 | length 2.6
  Top Layer w0.254: R5.1@125.057,95.631 125.852,95.631 126.213,95.27 U?.9@127.472,95.27
NetSWD_3: SWD.3 U?.34 | length 19
  Top Layer w0.254: U?.34@135.672,98.27 137.696,98.27 138.176,97.79 v1(138.684,97.79)
  Bottom Layer w0.254: v1(138.684,97.79) 142.799,93.675 142.799,90.332 139.573,87.107 SWD.3@139.573,85.09
NetSWD_4: SWD.4 U?.37 | length 23.8
  Top Layer w0.254: U?.37@134.322,100.62 134.322,100.247 134.747,99.822 135.649,99.822 136.665,100.838 v1(137.16,100.838)
  Bottom Layer w0.254: SWD.4@137.033,85.09 137.033,85.357 142.24,90.564 142.24,93.345 137.16,98.425 v1(137.16,100.838)
NRAT: C14.2 R?.1 RST?.2 U?.7 | length 116.8
  Top Layer w0.254: U?.7@127.472,96.27 129.282,96.27 v1(130.81,94.742) ; v1(141.351,91.224) 145.377,91.224 v1(145.415,91.186) ; R?.1@156.934,148.717 157.631,148.717 157.936,149.022 164.683,149.022 RST?.2@166.131,147.574 164.683,146.126 157.936,146.126 157.631,146.431 C14.2@156.972,146.431
  Bottom Layer w0.254: v1(130.81,94.742) 134.328,91.224 v1(141.351,91.224) ; v1(145.415,91.186) 146.145,91.186 147.034,92.075 147.034,124.945 147.362,125.273 147.371,125.273 148.59,126.492 163.195,126.492 169.545,132.842 169.545,144.145 v1@165.989,147.701
  other v1: 166.116,147.701
UART1_RX: R8.1 U?.31 | length 43.7
  Top Layer w0.254: v1(133.985,97.155) 134.37,96.77 U?.31@135.672,96.77 ; v1(135.763,100.711) 135.763,115.443 142.836,122.516 142.836,129.141 143.705,130.009 146.43,130.009 R8.1@147.993,131.572 R8.1@147.993,131.551
  Bottom Layer w0.254: v1(133.985,97.155) 133.985,98.933 v1(135.763,100.711)
UART1_TX: R9.1 U?.30 | length 47.3
  Top Layer w0.254: v1(133.985,96.266) 133.989,96.27 U?.30@135.672,96.27 ; v1(135.001,100.711) 135.001,115.697 142.277,122.973 142.277,131.863 142.963,132.549 144.508,132.549 145.054,133.096 R9.1@147.993,133.096
  Bottom Layer w0.254: v1@133.858,96.393 133.35,96.901 133.35,99.06 v1(135.001,100.711)
UART2_RX: U?.13 UART.3 | length 8
  Top Layer w0.254: UART.3@127.127,85.09 128.822,86.785 U?.13@128.822,92.42
UART2_TX: U?.12 UART.4 | length 9.9
  Top Layer w0.254: UART.4@124.587,85.09 127.472,87.975 U?.12@127.472,93.77
UART3_RX: R6.1 U?.22 | length 56.4
  Top Layer w0.254: U?.22@133.322,92.42 133.35,92.392 v1(133.35,89.916)
  Bottom Layer w0.254: v1(112.776,123.825) 112.014,123.063 112.014,121.412 113.538,119.888 113.538,93.151 118.069,88.621 132.055,88.621 v1(133.35,89.916)
UART3_TX: R7.1 U?.21 | length 52.3
  Top Layer w0.254: U?.21@132.822,92.42 132.842,92.4 v1(132.842,90.551)
  Bottom Layer w0.254: v1(112.776,121.92) 114.173,120.523 114.173,93.091 118.237,89.027 131.318,89.027 v1(132.842,90.551)
pads on no net: GPS.5 NB.1 NB.2 NB.3 NB.4 NB.5 NB.6 NB.7 NB.8 NB.11 NB.12 NB.15 NB.16 NB.17 NB.18 NB.19 NB.20 NB.21 NB.22 NB.23 NB.24 U1.8 X2.3
copper on no net: | length 1295.3